# EAGLE board Artemis-Nano-Panel (EAGLE 9.4.0), part 1 of 4
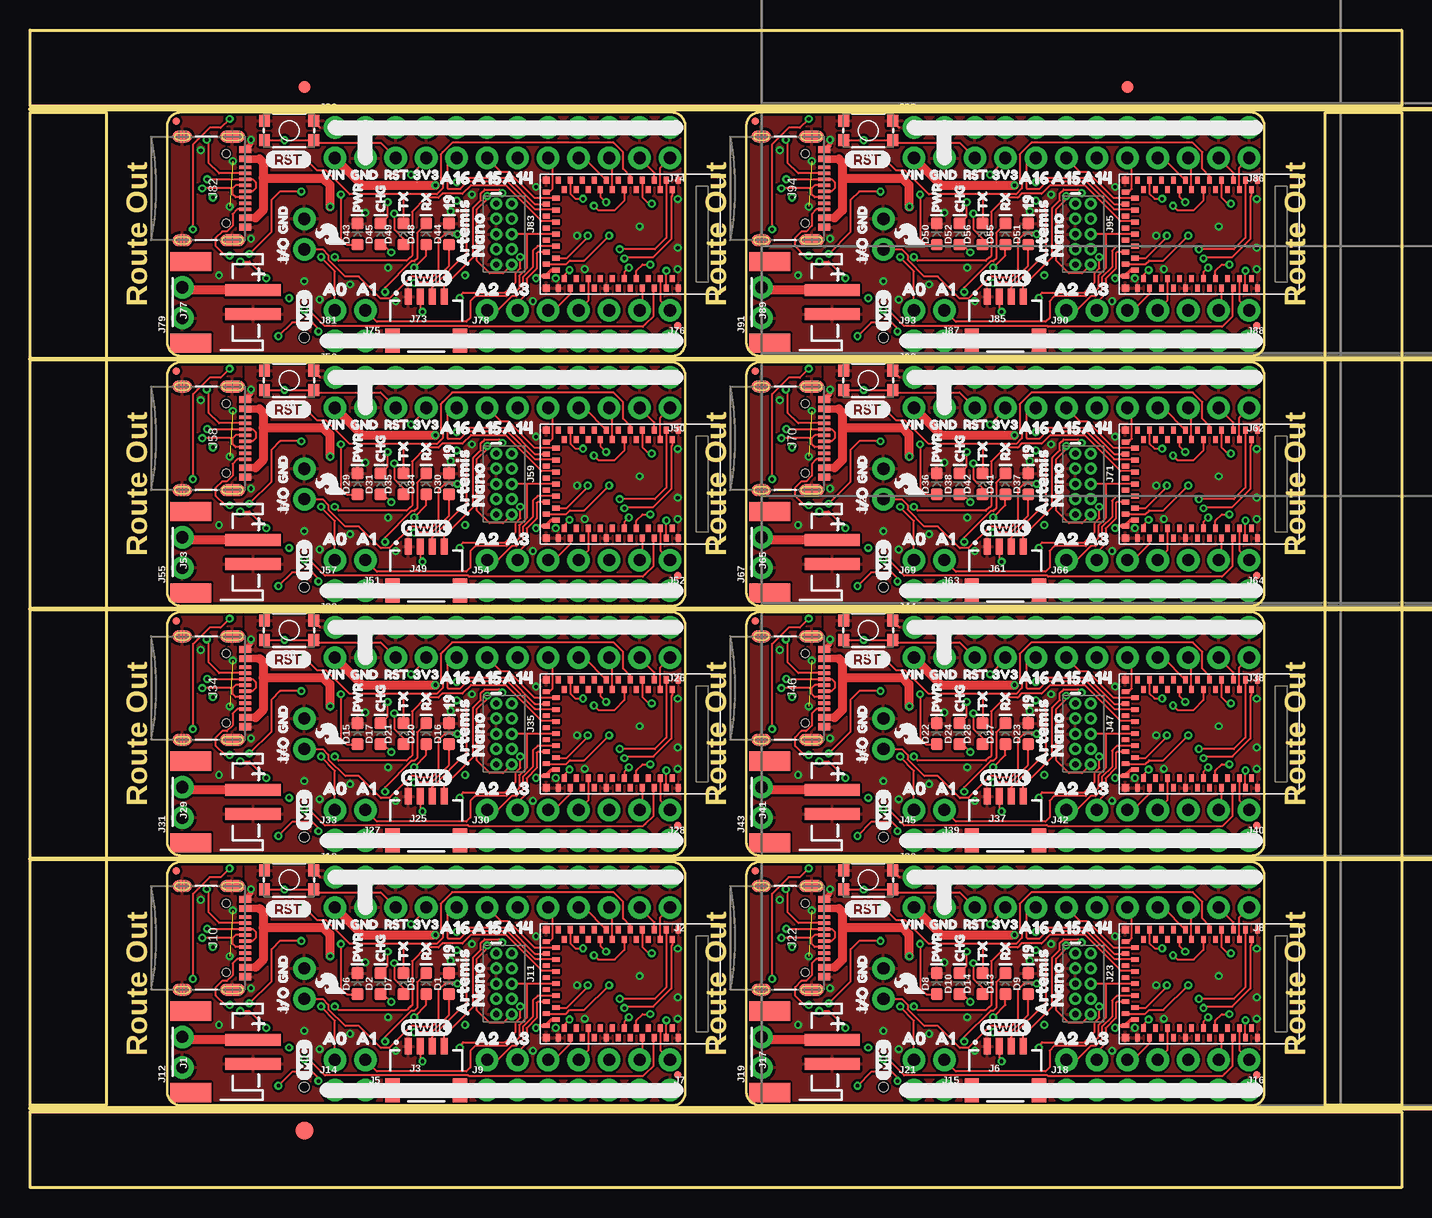
[diagram p0: board, top side]
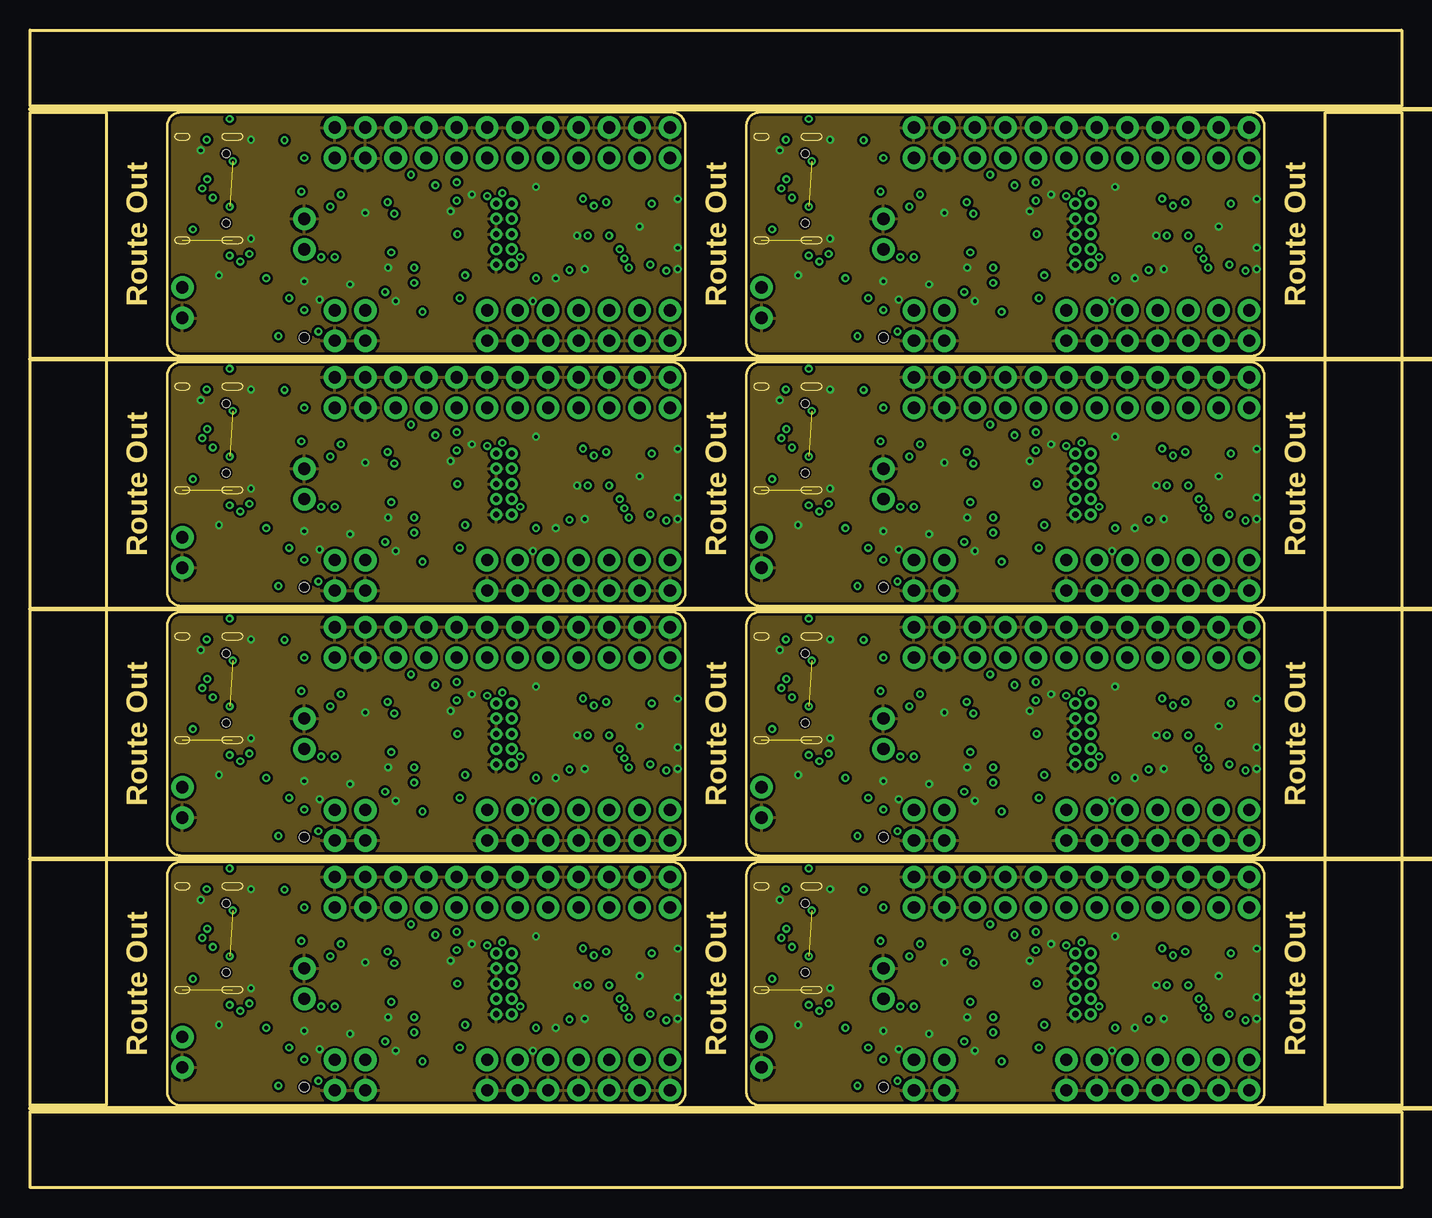
[diagram p1: board, inner layer Route2]
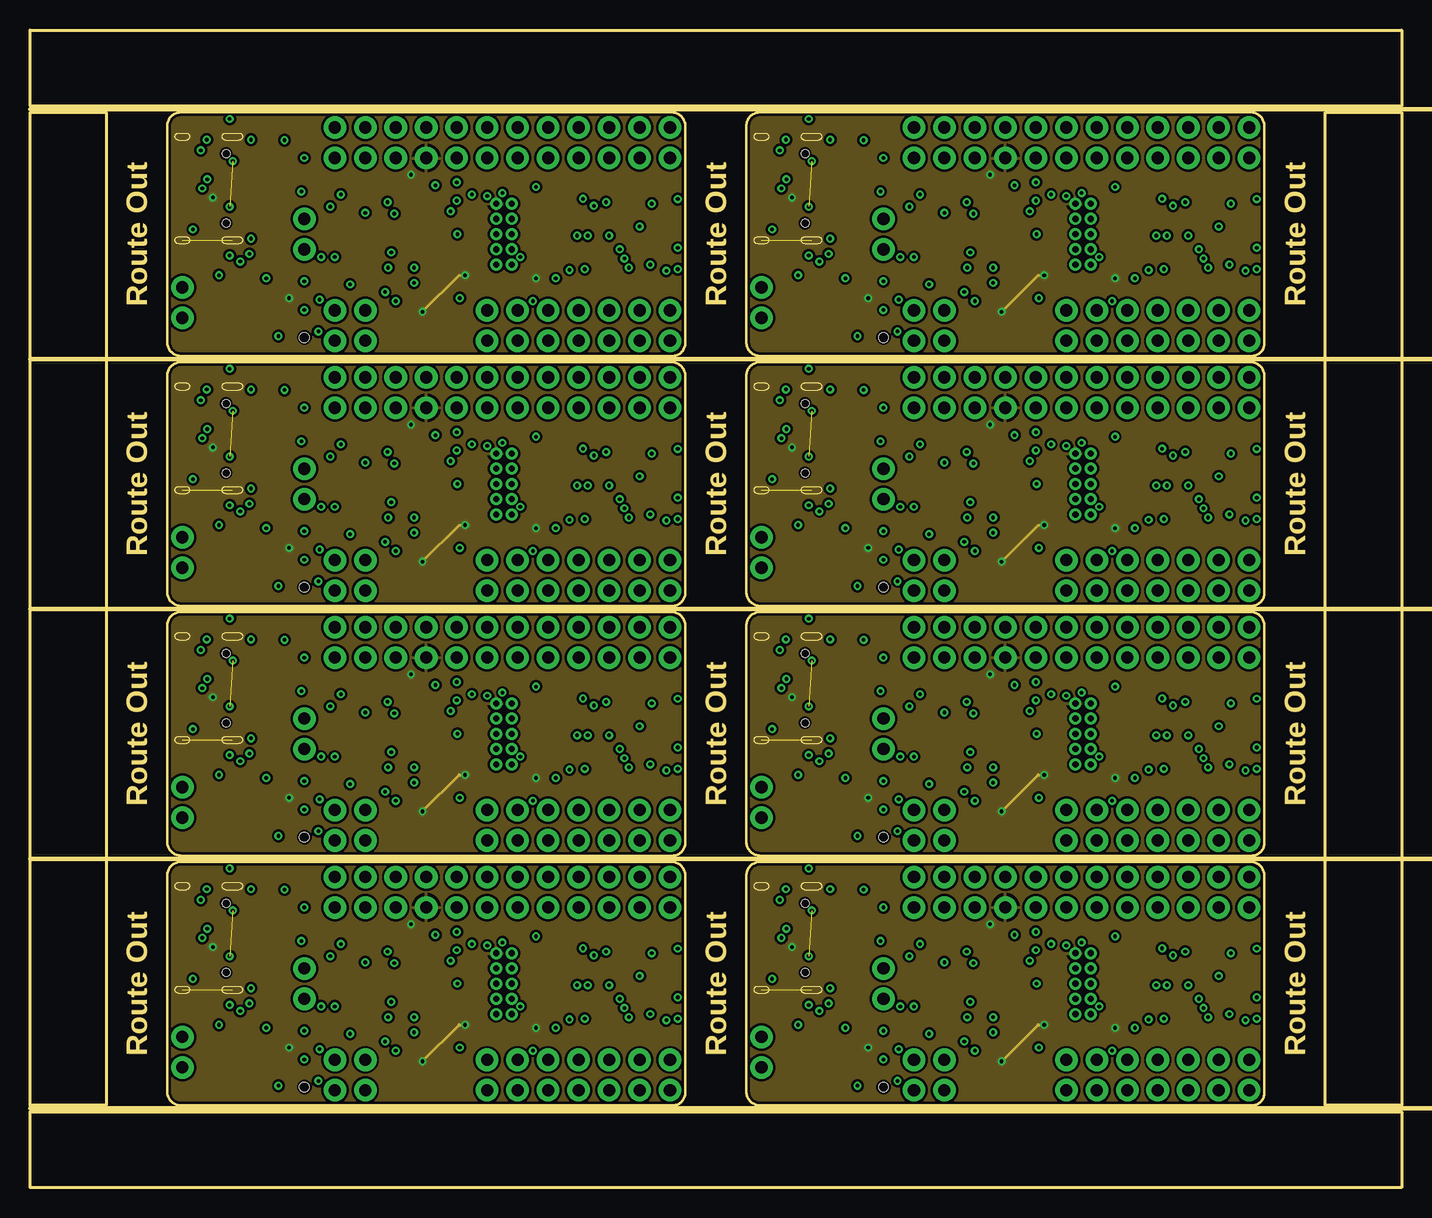
[diagram p2: board, inner layer Route15]
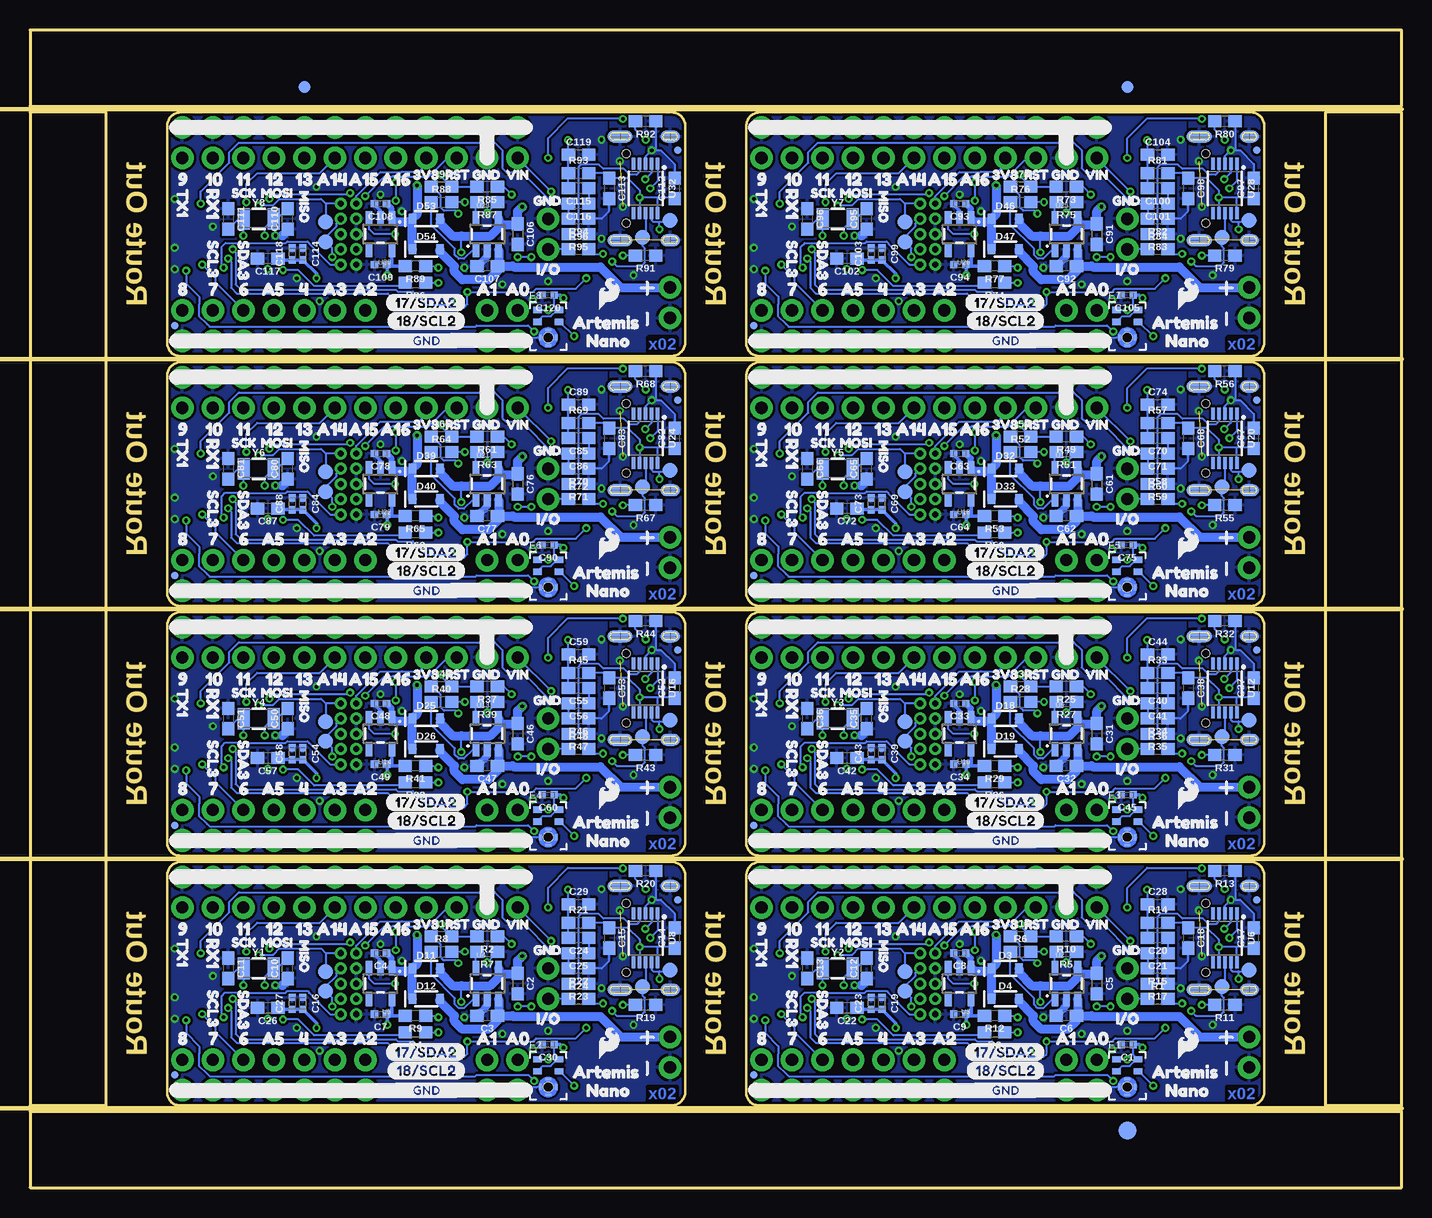
[diagram p3: board, bottom side, seen from below]

Size 114.3 x 96.52 mm. Coordinates in mm from the lower left corner, seen from the top.
Outline: 53.53,6.86 arc90 54.61,7.93 54.61,26.01 arc90 53.45,27.18 12.59,27.18 arc90 11.43,26.01 11.43,8.02 arc90 12.59,6.86 53.53,6.86
Outline: 101.79,6.86 arc90 102.87,7.93 102.87,26.01 arc90 101.71,27.18 60.85,27.18 arc90 59.69,26.01 59.69,8.02 arc90 60.85,6.86 101.79,6.86
Outline: 53.53,27.69 arc90 54.61,28.76 54.61,46.84 arc90 53.45,48.01 12.59,48.01 arc90 11.43,46.84 11.43,28.85 arc90 12.59,27.69 53.53,27.69
Outline: 101.79,27.69 arc90 102.87,28.76 102.87,46.84 arc90 101.71,48.01 60.85,48.01 arc90 59.69,46.84 59.69,28.85 arc90 60.85,27.69 101.79,27.69
Outline: 53.53,48.51 arc90 54.61,49.59 54.61,67.67 arc90 53.45,68.83 12.59,68.83 arc90 11.43,67.67 11.43,49.68 arc90 12.59,48.51 53.53,48.51
Outline: 101.79,48.51 arc90 102.87,49.59 102.87,67.67 arc90 101.71,68.83 60.85,68.83 arc90 59.69,67.67 59.69,49.68 arc90 60.85,48.51 101.79,48.51
Outline: 53.53,69.34 arc90 54.61,70.42 54.61,88.5 arc90 53.45,89.66 12.59,89.66 arc90 11.43,88.5 11.43,70.51 arc90 12.59,69.34 53.53,69.34
Outline: 101.79,69.34 arc90 102.87,70.42 102.87,88.5 arc90 101.71,89.66 60.85,89.66 arc90 59.69,88.5 59.69,70.51 arc90 60.85,69.34 101.79,69.34
Outline: 0,6.35 114.3,6.35 114.3,0 0,0 0,6.35
Outline: 107.95,89.66 114.3,89.66 114.3,6.86 107.95,6.86 107.95,89.66
Outline: 0,96.52 114.3,96.52 114.3,90.17 0,90.17 0,96.52
Outline: 0,89.66 6.35,89.66 6.35,6.86 0,6.86 0,89.66
Copper layers (1*2*15*16): Top 0.035559375mm / dielectric 0.47751875mm / Route2 0.035559375mm / dielectric 0.47751875mm / Route15 0.035559375mm / dielectric 0.47751875mm / Bottom 0.035559375mm
Design rules "SparkFun-4-layer-TIGHT": minimum track width 7mil, minimum drill 15mil, track to track 7mil, track to pad 7mil, pad to pad 7mil, via to via 7mil, smd to smd 7mil, copper to edge 7mil, drill to drill 7mil, minimum pad ring 7mil, minimum via ring 7mil, stop-mask expansion 4mil, vias tented up to drill 25mil, thermal gap 10mil
Net classes: 0 default: width 0 mm, drill 0 mm; 1 power: width 0.762 mm
Milling: 5 lines

## Footprints (pad centres in the part's own frame; a part is rotated, then mirrored left to right if it is on the bottom)
0402-TIGHT = smd 0.6 x 0.6: 1 -0.5,0; 2 0.5,0
0603 = smd 1.1 x 1: 1 -0.85,0; 2 0.85,0
LED-0603 = smd 1 x 1: A -0.877,0; C 0.877,0
SOD-323 = smd 0.63 x 0.83: A 1.15,0; C -1.15,0
SPH0641LM4H-1_MICROPHONE = smd 0.725 x 0.522: 1 -0.9,1.3; 2 -0.9,0.3; 4 0.9,0.3; 5 0.9,1.3 | smd 0.5 x 0.2: 3 0,-1.65; 8 0,-0.35 | smd 0.2 x 0.5: 6 -0.65,-1; 7 0.65,-1 | hole 0.8: 0,-1
FIDUCIAL-1X2 = smd 1 x 1: 1 0,0
FIDUCIAL-1.5X3 = smd 1.5 x 1.5: 1 0,0
FIDUCIAL-MICRO = smd 0.635 x 0.635: 1 0,0
JST-2-SMD = smd 1 x 4.6: 1 -1,-3.7; 2 1,-3.7 | smd 1.6 x 3.4: NC1 -3.4,1.5; NC2 3.4,1.5
1X12_NO_SILK = drill 1.016 pad 1.88: 1 0,0; 2 2.54,0; 3 5.08,0; 4 7.62,0; 5 10.16,0; 6 12.7,0; 7 15.24,0; 8 17.78,0; 9 20.32,0; 10 22.86,0; 11 25.4,0; 12 27.94,0
JST04_1MM_RA = smd 0.6 x 1.35: 1 -1.5,0; 2 -0.5,0; 3 0.5,0; 4 1.5,0 | smd 1.2 x 2: NC1 2.8,-3.675; NC2 -2.8,-3.675
1X02_NO_SILK = drill 1.016 pad 1.88: 1 0,0; 2 2.54,0
1X07_NO_SILK = drill 1.016 pad 1.88: 1 0,0; 2 2.54,0; 3 5.08,0; 4 7.62,0; 5 10.16,0; 6 12.7,0; 7 15.24,0
USB-C-16P = smd 0.3 x 1.016: A5 -1.25,0.154; A6 -0.25,0.154; A7 0.25,0.154; A8 1.25,0.154; B5 1.75,0.154; B6 0.75,0.154; B7 -0.75,0.154; B8 -1.75,0.154 | smd 0.6 x 1.016: GND -3.225,0.154; GND2 3.225,0.154 | smd 1 x 2.1: SHLD1 -4.32,-0.915; SHLD2 4.32,-0.915 | smd 1 x 2.1 bottom: SHLD3 -4.32,-0.915; SHLD4 4.32,-0.915 | smd 1 x 1.6: SHLD5 -4.32,-5.095; SHLD8 4.32,-5.095 | smd 1 x 1.6 bottom: SHLD6 -4.32,-5.095; SHLD7 4.32,-5.095 | smd 0.55 x 1.016: VBUS1 -2.45,0.154; VBUS2 2.45,0.154 | hole 0.65: -2.89,-1.445; 2.89,-1.445
2X5-PTH-1.27MM-NO_SILK = drill 0.508 pad 1: 1 -2.54,-0.635; 2 -2.54,0.635; 3 -1.27,-0.635; 4 -1.27,0.635; 5 0,-0.635; 6 0,0.635; 7 1.27,-0.635; 8 1.27,0.635; 9 2.54,-0.635; 10 2.54,0.635
TACTILE_SWITCH_SMD_4.6X2.8MM = smd 0.9 x 1: 1 -2.05,-0.8; 2 2.05,-0.8; 3 2.05,0.8; 4 -2.05,0.8
PAD.03X.05 = smd 1.27 x 1.27: P$1 0,0
ARTEMIS_FP = smd 0.4 x 0.6: AD16 -4,-3.7; BOOT 1.5,4.5; D0 0.5,-4.5; D1 -0.5,-4.5; D2 -1,-3.7; D3 2,-3.7; D7 -1.5,4.5; D8 -0.5,4.5; D9 2,3.7; D10 1,3.7; D14 -5,3.7; D17 -3.5,-4.5; D36 2.5,-4.5; D38 3,-3.7; D40 2.5,4.5; D41 -2.5,-4.5; GND@1 4.5,4.5; GND@39 -5.5,-4.5; GND@47 -1.5,-4.5; GND@59 4.5,-4.5; RXI-0 3.5,4.5; SWDCK 4,3.7; SWDIO 0,3.7; TXO-0 0.5,4.5; ~AD31 -3,-3.7; ~AD35 -2,3.7; ~D4 -2.5,4.5; ~D5 -1,3.7; ~D18 -4.5,-4.5; ~D19 -5,-3.7; ~D22 -3.5,4.5; ~D23 -4,3.7; ~D24 -3,3.7; ~D27 -4.5,4.5; ~D28 -5.5,4.5; ~D37 3.5,-4.5; ~D39 3,3.7; ~D42 1.5,-4.5; ~D43 1,-3.7; ~D44 4,-3.7; ~D45 -2,-3.7; ~RST 0,-3.7 | smd 0.6 x 0.4: AD34 -6.5,-0.5; D15 -6.5,0.5; VDD@36 -5.7,-3; VDD@37 -6.5,-3.5; XI -6.5,-2.5; XO -5.7,-2; ~AD11 -5.7,-1; ~AD12 -5.7,2; ~AD13 -5.7,1; ~AD29 -6.5,-1.5; ~AD32 -5.7,3; ~AD33/SWO -5.7,0; ~D6 -6.5,3.5; ~D25 -6.5,2.5; ~D26 -6.5,1.5 | smd 0.6 x 0.6: GND@22 -6.5,4.5; GND@38 -6.5,-4.5
SOT23-5 = smd 0.55 x 1.2: 1 -0.95,-1.3; 2 0,-1.3; 3 0.95,-1.3; 4 0.95,1.3; 5 -0.95,1.3
MSOP10 = smd 1 x 0.3: 1 -2.05,1; 2 -2.05,0.5; 3 -2.05,0; 4 -2.05,-0.5; 5 -2.05,-1; 6 2.05,-1; 7 2.05,-0.5; 8 2.05,0; 9 2.05,0.5; 10 2.05,1
CRYSTAL-SMD-3.2X1.5MM = smd 1 x 1.8: P$1 -1.25,0; P$2 1.25,0

## Placement (x,y rotation side)
C1  0.1uF  [0402-TIGHT]  22.86,11.94 180 bottom
C2  4.7uF  [0603]  73.66,17.02 270 bottom
C3  4.7uF  [0603]  76.2,14.35 180 bottom
C4  1.0uF  [0402-TIGHT]  85.09,19.56 180 bottom
C5  4.7uF  [0603]  25.4,17.02 270 bottom
C6  4.7uF  [0603]  27.94,14.35 180 bottom
C7  1.0uF  [0402-TIGHT]  85.09,14.48 180 bottom
C8  1.0uF  [0402-TIGHT]  36.83,19.56 180 bottom
C9  1.0uF  [0402-TIGHT]  36.83,14.48 180 bottom
C10  15pF  [0603]  92.84,18.29 90 bottom
C11  15pF  [0603]  97.79,18.29 270 bottom
C12  15pF  [0603]  44.58,18.29 90 bottom
C13  15pF  [0603]  49.53,18.29 270 bottom
C14  10nF  [0603]  60.58,20.83 90 bottom
C15  0.1uF  [0603]  66.04,20.83 270 bottom
C16  0.1uF  [0402-TIGHT]  91.57,15.37 270 bottom
C17  10nF  [0603]  12.32,20.83 90 bottom
C18  0.1uF  [0603]  17.78,20.83 270 bottom
C19  0.1uF  [0402-TIGHT]  43.31,15.37 270 bottom
C20  0.1uF  [0603]  20.32,20.83 180 bottom
C21  2.2uF  [0603]  20.32,19.56 180 bottom
C22  10uF  [0603]  46.23,14.99 180 bottom
C23  1.0uF  [0402-TIGHT]  44.2,15.37 90 bottom
C24  0.1uF  [0603]  68.58,20.83 180 bottom
C25  2.2uF  [0603]  68.58,19.56 180 bottom
C26  10uF  [0603]  94.49,14.99 180 bottom
C27  1.0uF  [0402-TIGHT]  92.46,15.37 90 bottom
C28  1nF  [0603]  20.32,23.62 0 bottom
C29  1nF  [0603]  68.58,23.62 0 bottom
C30  0.1uF  [0402-TIGHT]  71.12,11.94 180 bottom
C31  4.7uF  [0603]  25.4,37.85 270 bottom
C32  4.7uF  [0603]  27.94,35.18 180 bottom
C33  1.0uF  [0402-TIGHT]  36.83,40.39 180 bottom
C34  1.0uF  [0402-TIGHT]  36.83,35.31 180 bottom
C35  15pF  [0603]  44.58,39.12 90 bottom
C36  15pF  [0603]  49.53,39.12 270 bottom
C37  10nF  [0603]  12.32,41.66 90 bottom
C38  0.1uF  [0603]  17.78,41.66 270 bottom
C39  0.1uF  [0402-TIGHT]  43.31,36.2 270 bottom
C40  0.1uF  [0603]  20.32,41.66 180 bottom
C41  2.2uF  [0603]  20.32,40.39 180 bottom
C42  10uF  [0603]  46.23,35.81 180 bottom
C43  1.0uF  [0402-TIGHT]  44.2,36.2 90 bottom
C44  1nF  [0603]  20.32,44.45 0 bottom
C45  0.1uF  [0402-TIGHT]  22.86,32.77 180 bottom
C46  4.7uF  [0603]  73.66,37.85 270 bottom
C47  4.7uF  [0603]  76.2,35.18 180 bottom
C48  1.0uF  [0402-TIGHT]  85.09,40.39 180 bottom
C49  1.0uF  [0402-TIGHT]  85.09,35.31 180 bottom
C50  15pF  [0603]  92.84,39.12 90 bottom
C51  15pF  [0603]  97.79,39.12 270 bottom
C52  10nF  [0603]  60.58,41.66 90 bottom
C53  0.1uF  [0603]  66.04,41.66 270 bottom
C54  0.1uF  [0402-TIGHT]  91.57,36.2 270 bottom
C55  0.1uF  [0603]  68.58,41.66 180 bottom
C56  2.2uF  [0603]  68.58,40.39 180 bottom
C57  10uF  [0603]  94.49,35.81 180 bottom
C58  1.0uF  [0402-TIGHT]  92.46,36.2 90 bottom
C59  1nF  [0603]  68.58,44.45 0 bottom
C60  0.1uF  [0402-TIGHT]  71.12,32.77 180 bottom
C61  4.7uF  [0603]  25.4,58.67 270 bottom
C62  4.7uF  [0603]  27.94,56.01 180 bottom
C63  1.0uF  [0402-TIGHT]  36.83,61.21 180 bottom
C64  1.0uF  [0402-TIGHT]  36.83,56.13 180 bottom
C65  15pF  [0603]  44.58,59.94 90 bottom
C66  15pF  [0603]  49.53,59.94 270 bottom
C67  10nF  [0603]  12.32,62.48 90 bottom
C68  0.1uF  [0603]  17.78,62.48 270 bottom
C69  0.1uF  [0402-TIGHT]  43.31,57.02 270 bottom
C70  0.1uF  [0603]  20.32,62.48 180 bottom
C71  2.2uF  [0603]  20.32,61.21 180 bottom
C72  10uF  [0603]  46.23,56.64 180 bottom
C73  1.0uF  [0402-TIGHT]  44.2,57.02 90 bottom
C74  1nF  [0603]  20.32,65.28 0 bottom
C75  0.1uF  [0402-TIGHT]  22.86,53.59 180 bottom
C76  4.7uF  [0603]  73.66,58.67 270 bottom
C77  4.7uF  [0603]  76.2,56.01 180 bottom
C78  1.0uF  [0402-TIGHT]  85.09,61.21 180 bottom
C79  1.0uF  [0402-TIGHT]  85.09,56.13 180 bottom
C80  15pF  [0603]  92.84,59.94 90 bottom
C81  15pF  [0603]  97.79,59.94 270 bottom
C82  10nF  [0603]  60.58,62.48 90 bottom
C83  0.1uF  [0603]  66.04,62.48 270 bottom
C84  0.1uF  [0402-TIGHT]  91.57,57.02 270 bottom
C85  0.1uF  [0603]  68.58,62.48 180 bottom
C86  2.2uF  [0603]  68.58,61.21 180 bottom
C87  10uF  [0603]  94.49,56.64 180 bottom
C88  1.0uF  [0402-TIGHT]  92.46,57.02 90 bottom
C89  1nF  [0603]  68.58,65.28 0 bottom
C90  0.1uF  [0402-TIGHT]  71.12,53.59 180 bottom
C91  4.7uF  [0603]  25.4,79.5 270 bottom
C92  4.7uF  [0603]  27.94,76.84 180 bottom
C93  1.0uF  [0402-TIGHT]  36.83,82.04 180 bottom
C94  1.0uF  [0402-TIGHT]  36.83,76.96 180 bottom
C95  15pF  [0603]  44.58,80.77 90 bottom
C96  15pF  [0603]  49.53,80.77 270 bottom
C97  10nF  [0603]  12.32,83.31 90 bottom
C98  0.1uF  [0603]  17.78,83.31 270 bottom
C99  0.1uF  [0402-TIGHT]  43.31,77.85 270 bottom
C100  0.1uF  [0603]  20.32,83.31 180 bottom
C101  2.2uF  [0603]  20.32,82.04 180 bottom
C102  10uF  [0603]  46.23,77.47 180 bottom
C103  1.0uF  [0402-TIGHT]  44.2,77.85 90 bottom
C104  1nF  [0603]  20.32,86.11 0 bottom
C105  0.1uF  [0402-TIGHT]  22.86,74.42 180 bottom
C106  4.7uF  [0603]  73.66,79.5 270 bottom
C107  4.7uF  [0603]  76.2,76.84 180 bottom
C108  1.0uF  [0402-TIGHT]  85.09,82.04 180 bottom
C109  1.0uF  [0402-TIGHT]  85.09,76.96 180 bottom
C110  15pF  [0603]  92.84,80.77 90 bottom
C111  15pF  [0603]  97.79,80.77 270 bottom
C112  10nF  [0603]  60.58,83.31 90 bottom
C113  0.1uF  [0603]  66.04,83.31 270 bottom
C114  0.1uF  [0402-TIGHT]  91.57,77.85 270 bottom
C115  0.1uF  [0603]  68.58,83.31 180 bottom
C116  2.2uF  [0603]  68.58,82.04 180 bottom
C117  10uF  [0603]  94.49,77.47 180 bottom
C118  1.0uF  [0402-TIGHT]  92.46,77.85 90 bottom
C119  1nF  [0603]  68.58,86.11 0 bottom
C120  0.1uF  [0402-TIGHT]  71.12,74.42 180 bottom
D1  BLUE  [LED-0603]  34.92,17.02 90 top
D2  Yellow  [LED-0603]  29.21,17.02 90 top
D3  1A/23V/620mV  [SOD-323]  33.02,18.29 0 bottom
D4  1A/23V/620mV  [SOD-323]  33.02,15.75 0 bottom
D5  Yellow  [LED-0603]  33.02,17.02 90 top
D6  RED  [LED-0603]  27.3,17.02 90 top
D7  GREEN  [LED-0603]  31.11,17.02 90 top
D8  RED  [LED-0603]  75.56,17.02 90 top
D9  BLUE  [LED-0603]  83.19,17.02 90 top
D10  Yellow  [LED-0603]  77.47,17.02 90 top
D11  1A/23V/620mV  [SOD-323]  81.28,18.29 0 bottom
D12  1A/23V/620mV  [SOD-323]  81.28,15.75 0 bottom
D13  Yellow  [LED-0603]  81.28,17.02 90 top
D14  GREEN  [LED-0603]  79.38,17.02 90 top
D15  RED  [LED-0603]  27.3,37.85 90 top
D16  BLUE  [LED-0603]  34.92,37.85 90 top
D17  Yellow  [LED-0603]  29.21,37.85 90 top
D18  1A/23V/620mV  [SOD-323]  33.02,39.12 0 bottom
D19  1A/23V/620mV  [SOD-323]  33.02,36.58 0 bottom
D20  Yellow  [LED-0603]  33.02,37.85 90 top
D21  GREEN  [LED-0603]  31.11,37.85 90 top
D22  RED  [LED-0603]  75.56,37.85 90 top
D23  BLUE  [LED-0603]  83.19,37.85 90 top
D24  Yellow  [LED-0603]  77.47,37.85 90 top
D25  1A/23V/620mV  [SOD-323]  81.28,39.12 0 bottom
D26  1A/23V/620mV  [SOD-323]  81.28,36.58 0 bottom
D27  Yellow  [LED-0603]  81.28,37.85 90 top
D28  GREEN  [LED-0603]  79.38,37.85 90 top
D29  RED  [LED-0603]  27.3,58.67 90 top
D30  BLUE  [LED-0603]  34.92,58.67 90 top
D31  Yellow  [LED-0603]  29.21,58.67 90 top
D32  1A/23V/620mV  [SOD-323]  33.02,59.94 0 bottom
D33  1A/23V/620mV  [SOD-323]  33.02,57.4 0 bottom
D34  Yellow  [LED-0603]  33.02,58.67 90 top
D35  GREEN  [LED-0603]  31.11,58.67 90 top
D36  RED  [LED-0603]  75.56,58.67 90 top
D37  BLUE  [LED-0603]  83.19,58.67 90 top
D38  Yellow  [LED-0603]  77.47,58.67 90 top
D39  1A/23V/620mV  [SOD-323]  81.28,59.94 0 bottom
D40  1A/23V/620mV  [SOD-323]  81.28,57.4 0 bottom
D41  Yellow  [LED-0603]  81.28,58.67 90 top
D42  GREEN  [LED-0603]  79.38,58.67 90 top
D43  RED  [LED-0603]  27.3,79.5 90 top
D44  BLUE  [LED-0603]  34.92,79.5 90 top
D45  Yellow  [LED-0603]  29.21,79.5 90 top
D46  1A/23V/620mV  [SOD-323]  33.02,80.77 0 bottom
D47  1A/23V/620mV  [SOD-323]  33.02,78.23 0 bottom
D48  Yellow  [LED-0603]  33.02,79.5 90 top
D49  GREEN  [LED-0603]  31.11,79.5 90 top
D50  RED  [LED-0603]  75.56,79.5 90 top
D51  BLUE  [LED-0603]  83.19,79.5 90 top
D52  Yellow  [LED-0603]  77.47,79.5 90 top
D53  1A/23V/620mV  [SOD-323]  81.28,80.77 0 bottom
D54  1A/23V/620mV  [SOD-323]  81.28,78.23 0 bottom
D55  Yellow  [LED-0603]  81.28,79.5 90 top
D56  GREEN  [LED-0603]  79.38,79.5 90 top
E1  SPH0641LM4H  [SPH0641LM4H-1_MICROPHONE]  22.86,9.4 0 bottom
E2  SPH0641LM4H  [SPH0641LM4H-1_MICROPHONE]  71.12,9.4 0 bottom
E3  SPH0641LM4H  [SPH0641LM4H-1_MICROPHONE]  22.86,30.23 0 bottom
E4  SPH0641LM4H  [SPH0641LM4H-1_MICROPHONE]  71.12,30.23 0 bottom
E5  SPH0641LM4H  [SPH0641LM4H-1_MICROPHONE]  22.86,51.05 0 bottom
E6  SPH0641LM4H  [SPH0641LM4H-1_MICROPHONE]  71.12,51.05 0 bottom
E7  SPH0641LM4H  [SPH0641LM4H-1_MICROPHONE]  22.86,71.88 0 bottom
E8  SPH0641LM4H  [SPH0641LM4H-1_MICROPHONE]  71.12,71.88 0 bottom
E$1  [FIDUCIAL-1X2]  22.86,91.76 0 top
E$2  [FIDUCIAL-1X2]  22.86,91.76 0 bottom
E$3  [FIDUCIAL-1X2]  91.44,91.76 0 top
E$4  [FIDUCIAL-1X2]  91.44,91.76 0 bottom
E$5  [FIDUCIAL-1.5X3]  22.86,4.76 0 top
E$6  [FIDUCIAL-1.5X3]  22.86,4.76 0 bottom
FD1  FIDUCIALUFIDUCIAL  [FIDUCIAL-MICRO]  53.98,9.4 0 top
FD2  FIDUCIALUFIDUCIAL  [FIDUCIAL-MICRO]  12.19,26.42 0 top
FD3  FIDUCIALUFIDUCIAL  [FIDUCIAL-MICRO]  12.06,24 0 bottom
FD4  FIDUCIALUFIDUCIAL  [FIDUCIAL-MICRO]  53.98,9.4 0 bottom
FD5  FIDUCIALUFIDUCIAL  [FIDUCIAL-MICRO]  102.24,9.4 0 top
FD6  FIDUCIALUFIDUCIAL  [FIDUCIAL-MICRO]  60.45,26.42 0 top
FD7  FIDUCIALUFIDUCIAL  [FIDUCIAL-MICRO]  60.33,24 0 bottom
FD8  FIDUCIALUFIDUCIAL  [FIDUCIAL-MICRO]  102.24,9.4 0 bottom
FD9  FIDUCIALUFIDUCIAL  [FIDUCIAL-MICRO]  53.98,30.23 0 top
FD10  FIDUCIALUFIDUCIAL  [FIDUCIAL-MICRO]  12.19,47.24 0 top
FD11  FIDUCIALUFIDUCIAL  [FIDUCIAL-MICRO]  12.06,44.83 0 bottom
FD12  FIDUCIALUFIDUCIAL  [FIDUCIAL-MICRO]  53.98,30.23 0 bottom
FD13  FIDUCIALUFIDUCIAL  [FIDUCIAL-MICRO]  102.24,30.23 0 top
FD14  FIDUCIALUFIDUCIAL  [FIDUCIAL-MICRO]  60.45,47.24 0 top
FD15  FIDUCIALUFIDUCIAL  [FIDUCIAL-MICRO]  60.33,44.83 0 bottom
FD16  FIDUCIALUFIDUCIAL  [FIDUCIAL-MICRO]  102.24,30.23 0 bottom
FD17  FIDUCIALUFIDUCIAL  [FIDUCIAL-MICRO]  53.98,51.05 0 top
FD18  FIDUCIALUFIDUCIAL  [FIDUCIAL-MICRO]  12.19,68.07 0 top
FD19  FIDUCIALUFIDUCIAL  [FIDUCIAL-MICRO]  12.06,65.66 0 bottom
FD20  FIDUCIALUFIDUCIAL  [FIDUCIAL-MICRO]  53.98,51.05 0 bottom
FD21  FIDUCIALUFIDUCIAL  [FIDUCIAL-MICRO]  102.24,51.05 0 top
FD22  FIDUCIALUFIDUCIAL  [FIDUCIAL-MICRO]  60.45,68.07 0 top
FD23  FIDUCIALUFIDUCIAL  [FIDUCIAL-MICRO]  60.33,65.66 0 bottom
FD24  FIDUCIALUFIDUCIAL  [FIDUCIAL-MICRO]  102.24,51.05 0 bottom
FD25  FIDUCIALUFIDUCIAL  [FIDUCIAL-MICRO]  53.98,71.88 0 top
FD26  FIDUCIALUFIDUCIAL  [FIDUCIAL-MICRO]  12.19,88.9 0 top
FD27  FIDUCIALUFIDUCIAL  [FIDUCIAL-MICRO]  12.06,86.49 0 bottom
FD28  FIDUCIALUFIDUCIAL  [FIDUCIAL-MICRO]  53.98,71.88 0 bottom
FD29  FIDUCIALUFIDUCIAL  [FIDUCIAL-MICRO]  102.24,71.88 0 top
FD30  FIDUCIALUFIDUCIAL  [FIDUCIAL-MICRO]  60.45,88.9 0 top
FD31  FIDUCIALUFIDUCIAL  [FIDUCIAL-MICRO]  60.33,86.49 0 bottom
FD32  FIDUCIALUFIDUCIAL  [FIDUCIAL-MICRO]  102.24,71.88 0 bottom
FRAME1  FRAME-LETTERNO_PACKAGE  [DUMMY]  59.69,6.86 0 bottom
FRAME2  FRAME-LETTERNO_PACKAGE  [DUMMY]  11.43,6.86 0 bottom
FRAME3  FRAME-LETTERNO_PACKAGE  [DUMMY]  11.43,27.69 0 bottom
FRAME4  FRAME-LETTERNO_PACKAGE  [DUMMY]  59.69,27.69 0 bottom
FRAME5  FRAME-LETTERNO_PACKAGE  [DUMMY]  11.43,48.51 0 bottom
FRAME6  FRAME-LETTERNO_PACKAGE  [DUMMY]  59.69,48.51 0 bottom
FRAME7  FRAME-LETTERNO_PACKAGE  [DUMMY]  11.43,69.34 0 bottom
FRAME8  FRAME-LETTERNO_PACKAGE  [DUMMY]  59.69,69.34 0 bottom
J1  [JST-2-SMD]  14.88,11.33 90 top
J2  [1X12_NO_SILK]  53.34,23.37 180 top
J3  [JST04_1MM_RA]  33.02,11.81 0 top
J4  [1X02_NO_SILK]  22.86,15.75 90 top
J5  [1X02_NO_SILK]  27.94,10.67 180 top
J6  [JST04_1MM_RA]  81.28,11.81 0 top
J7  [1X07_NO_SILK]  53.34,10.67 180 top
J8  [1X12_NO_SILK]  101.6,23.37 180 top
J9  [1X07_NO_SILK]  38.1,8.13 0 top
J10  USB-C  [USB-C-16P]  17.78,20.83 270 top
J11  CORTEX_DEBUG  [2X5-PTH-1.27MM-NO_SILK]  39.5,17.02 270 top
J12  [1X02_NO_SILK]  12.7,10.03 90 top
J13  [1X12_NO_SILK]  25.4,25.91 0 top
J14  [1X02_NO_SILK]  25.4,8.13 0 top
J15  [1X02_NO_SILK]  76.2,10.67 180 top
J16  [1X07_NO_SILK]  101.6,10.67 180 top
J17  [JST-2-SMD]  63.14,11.33 90 top
J18  [1X07_NO_SILK]  86.36,8.13 0 top
J19  [1X02_NO_SILK]  60.96,10.03 90 top
J20  [1X12_NO_SILK]  73.66,25.91 0 top
J21  [1X02_NO_SILK]  73.66,8.13 0 top
J22  USB-C  [USB-C-16P]  66.04,20.83 270 top
J23  CORTEX_DEBUG  [2X5-PTH-1.27MM-NO_SILK]  87.76,17.02 270 top
J24  [1X02_NO_SILK]  71.12,15.75 90 top
J25  [JST04_1MM_RA]  33.02,32.64 0 top
J26  [1X12_NO_SILK]  53.34,44.2 180 top
J27  [1X02_NO_SILK]  27.94,31.5 180 top
J28  [1X07_NO_SILK]  53.34,31.5 180 top
J29  [JST-2-SMD]  14.88,32.16 90 top
J30  [1X07_NO_SILK]  38.1,28.96 0 top
J31  [1X02_NO_SILK]  12.7,30.86 90 top
J32  [1X12_NO_SILK]  25.4,46.74 0 top
J33  [1X02_NO_SILK]  25.4,28.96 0 top
J34  USB-C  [USB-C-16P]  17.78,41.66 270 top
J35  CORTEX_DEBUG  [2X5-PTH-1.27MM-NO_SILK]  39.5,37.85 270 top
J36  [1X02_NO_SILK]  22.86,36.58 90 top
J37  [JST04_1MM_RA]  81.28,32.64 0 top
J38  [1X12_NO_SILK]  101.6,44.2 180 top
J39  [1X02_NO_SILK]  76.2,31.5 180 top
J40  [1X07_NO_SILK]  101.6,31.5 180 top
J41  [JST-2-SMD]  63.14,32.16 90 top
J42  [1X07_NO_SILK]  86.36,28.96 0 top
J43  [1X02_NO_SILK]  60.96,30.86 90 top
J44  [1X12_NO_SILK]  73.66,46.74 0 top
J45  [1X02_NO_SILK]  73.66,28.96 0 top
J46  USB-C  [USB-C-16P]  66.04,41.66 270 top
J47  CORTEX_DEBUG  [2X5-PTH-1.27MM-NO_SILK]  87.76,37.85 270 top
J48  [1X02_NO_SILK]  71.12,36.58 90 top
J49  [JST04_1MM_RA]  33.02,53.47 0 top
J50  [1X12_NO_SILK]  53.34,65.02 180 top
J51  [1X02_NO_SILK]  27.94,52.32 180 top
J52  [1X07_NO_SILK]  53.34,52.32 180 top
J53  [JST-2-SMD]  14.88,52.98 90 top
J54  [1X07_NO_SILK]  38.1,49.78 0 top
J55  [1X02_NO_SILK]  12.7,51.69 90 top
J56  [1X12_NO_SILK]  25.4,67.56 0 top
J57  [1X02_NO_SILK]  25.4,49.78 0 top
J58  USB-C  [USB-C-16P]  17.78,62.48 270 top
J59  CORTEX_DEBUG  [2X5-PTH-1.27MM-NO_SILK]  39.5,58.67 270 top
J60  [1X02_NO_SILK]  22.86,57.4 90 top
J61  [JST04_1MM_RA]  81.28,53.47 0 top
J62  [1X12_NO_SILK]  101.6,65.02 180 top
J63  [1X02_NO_SILK]  76.2,52.32 180 top
J64  [1X07_NO_SILK]  101.6,52.32 180 top
J65  [JST-2-SMD]  63.14,52.98 90 top
J66  [1X07_NO_SILK]  86.36,49.78 0 top
J67  [1X02_NO_SILK]  60.96,51.69 90 top
J68  [1X12_NO_SILK]  73.66,67.56 0 top
J69  [1X02_NO_SILK]  73.66,49.78 0 top
J70  USB-C  [USB-C-16P]  66.04,62.48 270 top
J71  CORTEX_DEBUG  [2X5-PTH-1.27MM-NO_SILK]  87.76,58.67 270 top
J72  [1X02_NO_SILK]  71.12,57.4 90 top
J73  [JST04_1MM_RA]  33.02,74.3 0 top
J74  [1X12_NO_SILK]  53.34,85.85 180 top
J75  [1X02_NO_SILK]  27.94,73.15 180 top
J76  [1X07_NO_SILK]  53.34,73.15 180 top
J77  [JST-2-SMD]  14.88,73.81 90 top
J78  [1X07_NO_SILK]  38.1,70.61 0 top
J79  [1X02_NO_SILK]  12.7,72.52 90 top
J80  [1X12_NO_SILK]  25.4,88.39 0 top
J81  [1X02_NO_SILK]  25.4,70.61 0 top
J82  USB-C  [USB-C-16P]  17.78,83.31 270 top
J83  CORTEX_DEBUG  [2X5-PTH-1.27MM-NO_SILK]  39.5,79.5 270 top
J84  [1X02_NO_SILK]  22.86,78.23 90 top
J85  [JST04_1MM_RA]  81.28,74.3 0 top
J86  [1X12_NO_SILK]  101.6,85.85 180 top
J87  [1X02_NO_SILK]  76.2,73.15 180 top
J88  [1X07_NO_SILK]  101.6,73.15 180 top
J89  [JST-2-SMD]  63.14,73.81 90 top
J90  [1X07_NO_SILK]  86.36,70.61 0 top
J91  [1X02_NO_SILK]  60.96,72.52 90 top
J92  [1X12_NO_SILK]  73.66,88.39 0 top
J93  [1X02_NO_SILK]  73.66,70.61 0 top
J94  USB-C  [USB-C-16P]  66.04,83.31 270 top
J95  CORTEX_DEBUG  [2X5-PTH-1.27MM-NO_SILK]  87.76,79.5 270 top
J96  [1X02_NO_SILK]  71.12,78.23 90 top
LOGO1  SFE_LOGO_FLAME.1_INCH  [SFE_LOGO_FLAME_.1]  25.02,17.02 90 top
LOGO2  SFE_LOGO_FLAME.1_INCH  [SFE_LOGO_FLAME_.1]  73.28,17.02 90 top
LOGO3  SFE_LOGO_FLAME.1_INCH  [SFE_LOGO_FLAME_.1]  66.04,12.06 0 bottom
LOGO4  SFE_LOGO_FLAME.1_INCH  [SFE_LOGO_FLAME_.1]  17.78,12.06 0 bottom
LOGO5  SFE_LOGO_FLAME.1_INCH  [SFE_LOGO_FLAME_.1]  25.02,37.85 90 top
LOGO6  SFE_LOGO_FLAME.1_INCH  [SFE_LOGO_FLAME_.1]  17.78,32.89 0 bottom
LOGO7  SFE_LOGO_FLAME.1_INCH  [SFE_LOGO_FLAME_.1]  73.28,37.85 90 top
LOGO8  SFE_LOGO_FLAME.1_INCH  [SFE_LOGO_FLAME_.1]  66.04,32.89 0 bottom
LOGO9  SFE_LOGO_FLAME.1_INCH  [SFE_LOGO_FLAME_.1]  25.02,58.67 90 top
LOGO10  SFE_LOGO_FLAME.1_INCH  [SFE_LOGO_FLAME_.1]  17.78,53.72 0 bottom
LOGO11  SFE_LOGO_FLAME.1_INCH  [SFE_LOGO_FLAME_.1]  73.28,58.67 90 top
LOGO12  SFE_LOGO_FLAME.1_INCH  [SFE_LOGO_FLAME_.1]  66.04,53.72 0 bottom
LOGO13  SFE_LOGO_FLAME.1_INCH  [SFE_LOGO_FLAME_.1]  25.02,79.5 90 top
LOGO14  SFE_LOGO_FLAME.1_INCH  [SFE_LOGO_FLAME_.1]  17.78,74.55 0 bottom
LOGO15  SFE_LOGO_FLAME.1_INCH  [SFE_LOGO_FLAME_.1]  73.28,79.5 90 top
LOGO16  SFE_LOGO_FLAME.1_INCH  [SFE_LOGO_FLAME_.1]  66.04,74.55 0 bottom
R1  10k  [0603]  20.32,15.75 0 bottom
R2  1k  [0603]  76.2,20.95 180 bottom
R3  1k  [0603]  33.91,12.95 180 bottom
R4  1k  [0603]  82.17,12.95 180 bottom
R5  2.0k  [0603]  27.94,19.68 180 bottom
R6  1k  [0603]  31.75,19.68 0 bottom
R7  2.0k  [0603]  76.2,19.68 180 bottom
R8  1k  [0603]  80.01,19.68 0 bottom
R9  4.7k  [0603]  82.17,14.35 180 bottom
R10  1k  [0603]  27.94,20.95 180 bottom
R11  5.1k  [0603]  14.73,15.24 180 bottom
R12  4.7k  [0603]  33.91,14.35 180 bottom
R13  5.1k  [0603]  14.73,26.42 180 bottom
R14  100k  [0603]  20.32,22.1 0 bottom
R15  10k  [0603]  20.32,18.29 180 bottom
R16  4.7k  [0603]  31.75,20.95 0 bottom
R17  100k  [0603]  20.32,17.02 180 bottom
R18  4.7k  [0603]  80.01,20.95 0 bottom
R19  5.1k  [0603]  62.99,15.24 180 bottom
R20  5.1k  [0603]  62.99,26.42 180 bottom
R21  100k  [0603]  68.58,22.1 0 bottom
R22  10k  [0603]  68.58,18.29 180 bottom
R23  100k  [0603]  68.58,17.02 180 bottom
R24  10k  [0603]  68.58,15.75 0 bottom
R25  1k  [0603]  27.94,41.78 180 bottom
R26  1k  [0603]  33.91,33.78 180 bottom
R27  2.0k  [0603]  27.94,40.51 180 bottom
R28  1k  [0603]  31.75,40.51 0 bottom
R29  4.7k  [0603]  33.91,35.18 180 bottom
R30  4.7k  [0603]  31.75,41.78 0 bottom
R31  5.1k  [0603]  14.73,36.07 180 bottom
R32  5.1k  [0603]  14.73,47.24 180 bottom
R33  100k  [0603]  20.32,42.93 0 bottom
R34  10k  [0603]  20.32,39.12 180 bottom
R35  100k  [0603]  20.32,37.85 180 bottom
R36  10k  [0603]  20.32,36.58 0 bottom
R37  1k  [0603]  76.2,41.78 180 bottom
R38  1k  [0603]  82.17,33.78 180 bottom
R39  2.0k  [0603]  76.2,40.51 180 bottom
R40  1k  [0603]  80.01,40.51 0 bottom
R41  4.7k  [0603]  82.17,35.18 180 bottom
R42  4.7k  [0603]  80.01,41.78 0 bottom
R43  5.1k  [0603]  62.99,36.07 180 bottom
R44  5.1k  [0603]  62.99,47.24 180 bottom
R45  100k  [0603]  68.58,42.93 0 bottom
R46  10k  [0603]  68.58,39.12 180 bottom
R47  100k  [0603]  68.58,37.85 180 bottom
R48  10k  [0603]  68.58,36.58 0 bottom
R49  1k  [0603]  27.94,62.61 180 bottom
R50  1k  [0603]  33.91,54.61 180 bottom
R51  2.0k  [0603]  27.94,61.34 180 bottom
R52  1k  [0603]  31.75,61.34 0 bottom
R53  4.7k  [0603]  33.91,56.01 180 bottom
R54  4.7k  [0603]  31.75,62.61 0 bottom
R55  5.1k  [0603]  14.73,56.9 180 bottom
R56  5.1k  [0603]  14.73,68.07 180 bottom
R57  100k  [0603]  20.32,63.75 0 bottom
R58  10k  [0603]  20.32,59.94 180 bottom
R59  100k  [0603]  20.32,58.67 180 bottom
R60  10k  [0603]  20.32,57.4 0 bottom
R61  1k  [0603]  76.2,62.61 180 bottom
R62  1k  [0603]  82.17,54.61 180 bottom
R63  2.0k  [0603]  76.2,61.34 180 bottom
R64  1k  [0603]  80.01,61.34 0 bottom
R65  4.7k  [0603]  82.17,56.01 180 bottom
R66  4.7k  [0603]  80.01,62.61 0 bottom
R67  5.1k  [0603]  62.99,56.9 180 bottom
R68  5.1k  [0603]  62.99,68.07 180 bottom
R69  100k  [0603]  68.58,63.75 0 bottom
R70  10k  [0603]  68.58,59.94 180 bottom
R71  100k  [0603]  68.58,58.67 180 bottom
R72  10k  [0603]  68.58,57.4 0 bottom
R73  1k  [0603]  27.94,83.44 180 bottom
R74  1k  [0603]  33.91,75.44 180 bottom
R75  2.0k  [0603]  27.94,82.17 180 bottom
R76  1k  [0603]  31.75,82.17 0 bottom
R77  4.7k  [0603]  33.91,76.84 180 bottom
R78  4.7k  [0603]  31.75,83.44 0 bottom
R79  5.1k  [0603]  14.73,77.72 180 bottom
R80  5.1k  [0603]  14.73,88.9 180 bottom
R81  100k  [0603]  20.32,84.58 0 bottom
R82  10k  [0603]  20.32,80.77 180 bottom
R83  100k  [0603]  20.32,79.5 180 bottom
R84  10k  [0603]  20.32,78.23 0 bottom
R85  1k  [0603]  76.2,83.44 180 bottom
R86  1k  [0603]  82.17,75.44 180 bottom
R87  2.0k  [0603]  76.2,82.17 180 bottom
R88  1k  [0603]  80.01,82.17 0 bottom
R89  4.7k  [0603]  82.17,76.84 180 bottom
R90  4.7k  [0603]  80.01,83.44 0 bottom
R91  5.1k  [0603]  62.99,77.72 180 bottom
R92  5.1k  [0603]  62.99,88.9 180 bottom
R93  100k  [0603]  68.58,84.58 0 bottom
R94  10k  [0603]  68.58,80.77 180 bottom
R95  100k  [0603]  68.58,79.5 180 bottom
R96  10k  [0603]  68.58,78.23 0 bottom
S1  RESET  [TACTILE_SWITCH_SMD_4.6X2.8MM]  21.59,25.65 180 top
S2  RESET  [TACTILE_SWITCH_SMD_4.6X2.8MM]  69.85,25.65 180 top
S3  RESET  [TACTILE_SWITCH_SMD_4.6X2.8MM]  21.59,46.48 180 top
S4  RESET  [TACTILE_SWITCH_SMD_4.6X2.8MM]  69.85,46.48 180 top
S5  RESET  [TACTILE_SWITCH_SMD_4.6X2.8MM]  21.59,67.31 180 top
S6  RESET  [TACTILE_SWITCH_SMD_4.6X2.8MM]  69.85,67.31 180 top
S7  RESET  [TACTILE_SWITCH_SMD_4.6X2.8MM]  21.59,88.14 180 top
S8  RESET  [TACTILE_SWITCH_SMD_4.6X2.8MM]  69.85,88.14 180 top
TP1  [PAD.03X.05]  41.4,16.38 0 bottom
TP2  [PAD.03X.05]  41.4,18.03 0 bottom
TP3  TEST-POINT3X5  [PAD.03X.05]  63.25,16.76 0 bottom
TP4  TEST-POINT3X5  [PAD.03X.05]  60.96,18.16 0 bottom
TP5  TEST-POINT3X5  [PAD.03X.05]  14.99,16.76 0 bottom
TP6  TEST-POINT3X5  [PAD.03X.05]  12.7,18.16 0 bottom
TP7  [PAD.03X.05]  89.66,16.38 0 bottom
TP8  [PAD.03X.05]  89.66,18.03 0 bottom
TP9  TEST-POINT3X5  [PAD.03X.05]  14.99,37.59 0 bottom
TP10  TEST-POINT3X5  [PAD.03X.05]  12.7,38.99 0 bottom
TP11  [PAD.03X.05]  41.4,37.21 0 bottom
TP12  [PAD.03X.05]  41.4,38.86 0 bottom
TP13  TEST-POINT3X5  [PAD.03X.05]  63.25,37.59 0 bottom
TP14  TEST-POINT3X5  [PAD.03X.05]  60.96,38.99 0 bottom
TP15  [PAD.03X.05]  89.66,37.21 0 bottom
TP16  [PAD.03X.05]  89.66,38.86 0 bottom
TP17  TEST-POINT3X5  [PAD.03X.05]  14.99,58.42 0 bottom
TP18  TEST-POINT3X5  [PAD.03X.05]  12.7,59.82 0 bottom
TP19  [PAD.03X.05]  41.4,58.04 0 bottom
TP20  [PAD.03X.05]  41.4,59.69 0 bottom
TP21  TEST-POINT3X5  [PAD.03X.05]  63.25,58.42 0 bottom
TP22  TEST-POINT3X5  [PAD.03X.05]  60.96,59.82 0 bottom
TP23  [PAD.03X.05]  89.66,58.04 0 bottom
TP24  [PAD.03X.05]  89.66,59.69 0 bottom
TP25  TEST-POINT3X5  [PAD.03X.05]  14.99,79.25 0 bottom
TP26  TEST-POINT3X5  [PAD.03X.05]  12.7,80.65 0 bottom
TP27  [PAD.03X.05]  41.4,78.87 0 bottom
TP28  [PAD.03X.05]  41.4,80.52 0 bottom
TP29  TEST-POINT3X5  [PAD.03X.05]  63.25,79.25 0 bottom
TP30  TEST-POINT3X5  [PAD.03X.05]  60.96,80.65 0 bottom
TP31  [PAD.03X.05]  89.66,78.87 0 bottom
TP32  [PAD.03X.05]  89.66,80.52 0 bottom
U1  ARTEMIS_MODULESMD  [ARTEMIS_FP]  49.53,17.02 0 top
U2  MCP73831  [SOT23-5]  27.94,17.02 0 bottom
U3  3.3V  [SOT23-5]  36.83,17.02 180 bottom
U4  MCP73831  [SOT23-5]  76.2,17.02 0 bottom
U5  3.3V  [SOT23-5]  85.09,17.02 180 bottom
U6  CH340E_MSOP10  [MSOP10]  14.73,20.83 270 bottom
U7  ARTEMIS_MODULESMD  [ARTEMIS_FP]  97.79,17.02 0 top
U8  CH340E_MSOP10  [MSOP10]  62.99,20.83 270 bottom
U9  MCP73831  [SOT23-5]  27.94,37.85 0 bottom
U10  3.3V  [SOT23-5]  36.83,37.85 180 bottom
U11  ARTEMIS_MODULESMD  [ARTEMIS_FP]  49.53,37.85 0 top
U12  CH340E_MSOP10  [MSOP10]  14.73,41.66 270 bottom
U13  MCP73831  [SOT23-5]  76.2,37.85 0 bottom
U14  3.3V  [SOT23-5]  85.09,37.85 180 bottom
U15  ARTEMIS_MODULESMD  [ARTEMIS_FP]  97.79,37.85 0 top
U16  CH340E_MSOP10  [MSOP10]  62.99,41.66 270 bottom
U17  MCP73831  [SOT23-5]  27.94,58.67 0 bottom
U18  3.3V  [SOT23-5]  36.83,58.67 180 bottom
U19  ARTEMIS_MODULESMD  [ARTEMIS_FP]  49.53,58.67 0 top
U20  CH340E_MSOP10  [MSOP10]  14.73,62.48 270 bottom
U21  MCP73831  [SOT23-5]  76.2,58.67 0 bottom
U22  3.3V  [SOT23-5]  85.09,58.67 180 bottom
U23  ARTEMIS_MODULESMD  [ARTEMIS_FP]  97.79,58.67 0 top
U24  CH340E_MSOP10  [MSOP10]  62.99,62.48 270 bottom
U25  MCP73831  [SOT23-5]  27.94,79.5 0 bottom
U26  3.3V  [SOT23-5]  36.83,79.5 180 bottom
U27  ARTEMIS_MODULESMD  [ARTEMIS_FP]  49.53,79.5 0 top
U28  CH340E_MSOP10  [MSOP10]  14.73,83.31 270 bottom
U29  MCP73831  [SOT23-5]  76.2,79.5 0 bottom
U30  3.3V  [SOT23-5]  85.09,79.5 180 bottom
U31  ARTEMIS_MODULESMD  [ARTEMIS_FP]  97.79,79.5 0 top
U32  CH340E_MSOP10  [MSOP10]  62.99,83.31 270 bottom
U$1  [3V316]  31.24,21.97 0 top
U$2  [____GND____2]  35.94,8.13 0 bottom
U$3  [RST19]  28.83,21.97 0 top
U$4  [I#O3]  21.08,13.97 90 top
U$5  [CHG26]  29.21,18.16 90 top
U$6  [PWR27]  27.3,18.16 90 top
U$7  [GND17]  26.04,21.97 0 top
U$8  [QWIIC#LOGO#JPG]  33.02,13.36 0 top
U$9  [A00]  23.49,12.45 0 top
U$10  [A57]  47.62,12.45 0 bottom
U$11  [SCL30]  50.8,17.27 270 bottom
U$12  [A145]  43.05,21.59 0 bottom
U$13  [ARTEMIS6]  21.72,9.65 0 bottom
U$14  [MISO5]  43.18,21.34 270 bottom
U$15  [MIC0]  22.86,8.89 90 top
U$16  [MOSI4]  47.5,20.45 0 bottom
U$17  [NANO7]  20.57,8.13 0 bottom
U$18  [SCK3]  49.91,20.45 0 bottom
U$19  [A32]  42.55,12.45 0 bottom
U$20  [A00]  27.3,12.45 0 bottom
U$21  [A21]  40,12.45 0 bottom
U$22  [ARTEMIS6]  36.07,13.46 90 top
U$23  [I#O3]  24.64,14.1 0 bottom
U$24  [NANO7]  37.34,14.22 90 top
U$25  [PRODUCTION_INSTRUCTIONS]  60.96,57.66 0 top
U$26  [191]  34.92,18.29 90 top
U$27  [VIN19]  23.62,21.97 0 top
U$28  [A156]  40.39,21.59 0 bottom
U$29  [GND17]  24.77,19.81 0 bottom
U$30  [GND2]  34.8,8.13 0 bottom
U$31  [SDA31]  48.26,17.27 270 bottom
U$32  [46]  44.58,12.45 0 bottom
U$33  [GND17]  29.84,21.97 0 bottom
U$34  [A10]  29.72,12.45 0 bottom
U$35  [68]  49.53,12.45 0 bottom
U$36  [79]  52.07,12.45 0 bottom
U$37  [810]  54.61,12.45 0 bottom
U$38  [RST19]  32.13,21.97 0 bottom
U$39  [VIN19]  27.05,21.97 0 bottom
U$40  [A10]  26.29,12.45 0 top
U$41  [A21]  36.2,12.45 0 top
U$42  [A32]  38.73,12.45 0 top
U$43  [GND17]  21.08,16.38 90 top
U$44  [CHG26]  77.47,18.16 90 top
U$45  [90]  54.61,21.59 0 bottom
U$46  [101]  52.32,21.59 0 bottom
U$47  [112]  49.78,21.59 0 bottom
U$48  [A167]  37.72,21.59 0 bottom
U$49  [3V316]  34.8,21.97 0 bottom
U$50  [RX10]  50.8,21.72 270 bottom
U$51  [RST1]  19.56,23.24 0 top
U$52  [123]  47.5,21.59 0 bottom
U$53  [134]  44.83,21.59 0 bottom
U$54  [A145]  38.48,21.72 0 top
U$55  [A156]  35.94,21.72 0 top
U$56  [A167]  33.27,21.72 0 top
U$57  [17#SDA21]  36.45,11.3 0 bottom
U$58  [PWR27]  75.56,18.16 90 top
U$59  [TX12]  53.34,21.72 270 bottom
U$60  [18#SCL20]  36.32,9.78 0 bottom
U$61  [QWIIC#LOGO#JPG]  81.28,13.36 0 top
U$62  [GND17]  74.3,21.97 0 top
U$63  [VIN19]  71.88,21.97 0 top
U$64  [RST19]  77.09,21.97 0 top
U$65  [3V316]  79.5,21.97 0 top
U$66  [RST1]  67.82,23.24 0 top
U$67  [RX23]  81.28,18.29 90 top
U$68  [TX22]  79.38,18.29 90 top
U$69  [GND17]  78.1,21.97 0 bottom
U$70  [RST19]  80.39,21.97 0 bottom
U$71  [VIN19]  75.31,21.97 0 bottom
U$72  [3V316]  83.06,21.97 0 bottom
U$73  [ARTEMIS6]  69.98,9.65 0 bottom
U$74  [MIC0]  71.12,8.89 90 top
U$75  [MISO5]  91.44,21.34 270 bottom
U$76  [MOSI4]  95.76,20.45 0 bottom
U$77  [NANO7]  68.83,8.13 0 bottom
U$78  [SCK3]  98.17,20.45 0 bottom
U$79  [ARTEMIS6]  84.33,13.46 90 top
U$80  [NANO7]  85.6,14.22 90 top
U$81  [GND2]  83.06,8.13 0 bottom
U$82  [____GND____2]  84.2,8.13 0 bottom
U$83  [PRODUCTION_INSTRUCTIONS]  109.22,57.66 0 top
U$84  [A00]  71.75,12.45 0 top
U$85  [RX23]  33.02,18.29 90 top
U$86  [TX22]  31.11,18.29 90 top
U$87  [46]  92.84,12.45 0 bottom
U$88  [68]  97.79,12.45 0 bottom
U$89  [79]  100.33,12.45 0 bottom
U$90  [810]  102.87,12.45 0 bottom
U$91  [A10]  74.55,12.45 0 top
U$92  [A21]  84.46,12.45 0 top
U$93  [A32]  87,12.45 0 top
U$94  [90]  102.87,21.59 0 bottom
U$95  [101]  100.58,21.59 0 bottom
U$96  [112]  98.04,21.59 0 bottom
U$97  [123]  95.76,21.59 0 bottom
U$98  [134]  93.09,21.59 0 bottom
U$99  [A145]  86.74,21.72 0 top
U$100  [A156]  84.2,21.72 0 top
U$101  [A167]  81.53,21.72 0 top
U$102  [SCL30]  99.06,17.27 270 bottom
U$103  [SDA31]  96.52,17.27 270 bottom
U$104  [TX12]  101.6,21.72 270 bottom
U$105  [A57]  95.88,12.45 0 bottom
U$106  [A32]  90.81,12.45 0 bottom
U$107  [A21]  88.26,12.45 0 bottom
U$108  [A00]  75.56,12.45 0 bottom
U$109  [A10]  77.98,12.45 0 bottom
U$110  [A145]  91.31,21.59 0 bottom
U$111  [A156]  88.65,21.59 0 bottom
U$112  [A167]  85.98,21.59 0 bottom
U$113  [RX10]  99.06,21.72 270 bottom
U$114  [17#SDA21]  84.71,11.3 0 bottom
U$115  [18#SCL20]  84.58,9.78 0 bottom
U$116  [191]  83.19,18.29 90 top
U$117  [I#O3]  69.34,13.97 90 top
U$118  [GND17]  69.34,16.38 90 top
U$119  [I#O3]  72.9,14.1 0 bottom
U$120  [GND17]  73.03,19.81 0 bottom
U$121  [CHG26]  29.21,38.99 90 top
U$122  [PWR27]  27.3,38.99 90 top
U$123  [QWIIC#LOGO#JPG]  33.02,34.19 0 top
U$124  [GND17]  26.04,42.8 0 top
U$125  [VIN19]  23.62,42.8 0 top
U$126  [RST19]  28.83,42.8 0 top
U$127  [3V316]  31.24,42.8 0 top
U$128  [RST1]  19.56,44.07 0 top
U$129  [RX23]  33.02,39.12 90 top
U$130  [TX22]  31.11,39.12 90 top
U$131  [GND17]  29.84,42.8 0 bottom
U$132  [RST19]  32.13,42.8 0 bottom
U$133  [VIN19]  27.05,42.8 0 bottom
U$134  [3V316]  34.8,42.8 0 bottom
U$135  [ARTEMIS6]  21.72,30.48 0 bottom
U$136  [MIC0]  22.86,29.72 90 top
U$137  [MISO5]  43.18,42.16 270 bottom
U$138  [MOSI4]  47.5,41.27 0 bottom
U$139  [NANO7]  20.57,28.96 0 bottom
U$140  [SCK3]  49.91,41.27 0 bottom
U$141  [ARTEMIS6]  36.07,34.29 90 top
U$142  [NANO7]  37.34,35.05 90 top
U$143  [GND2]  34.8,28.96 0 bottom
U$144  [____GND____2]  35.94,28.96 0 bottom
U$145  [PRODUCTION_INSTRUCTIONS]  60.96,78.49 0 top
U$146  [A00]  23.49,33.27 0 top
U$147  [46]  44.58,33.27 0 bottom
U$148  [68]  49.53,33.27 0 bottom
U$149  [79]  52.07,33.27 0 bottom
U$150  [810]  54.61,33.27 0 bottom
U$151  [A10]  26.29,33.27 0 top
U$152  [A21]  36.2,33.27 0 top
U$153  [A32]  38.73,33.27 0 top
U$154  [90]  54.61,42.42 0 bottom
U$155  [101]  52.32,42.42 0 bottom
U$156  [112]  49.78,42.42 0 bottom
U$157  [123]  47.5,42.42 0 bottom
U$158  [134]  44.83,42.42 0 bottom
U$159  [A145]  38.48,42.54 0 top
U$160  [A156]  35.94,42.54 0 top
U$161  [A167]  33.27,42.54 0 top
U$162  [SCL30]  50.8,38.1 270 bottom
U$163  [SDA31]  48.26,38.1 270 bottom
U$164  [TX12]  53.34,42.54 270 bottom
U$165  [A57]  47.62,33.27 0 bottom
U$166  [A32]  42.55,33.27 0 bottom
U$167  [A21]  40,33.27 0 bottom
U$168  [A00]  27.3,33.27 0 bottom
U$169  [A10]  29.72,33.27 0 bottom
U$170  [A145]  43.05,42.42 0 bottom
U$171  [A156]  40.39,42.42 0 bottom
U$172  [A167]  37.72,42.42 0 bottom
U$173  [RX10]  50.8,42.54 270 bottom
U$174  [17#SDA21]  36.45,32.13 0 bottom
U$175  [18#SCL20]  36.32,30.61 0 bottom
U$176  [191]  34.92,39.12 90 top
U$177  [I#O3]  21.08,34.8 90 top
U$178  [GND17]  21.08,37.21 90 top
U$179  [I#O3]  24.64,34.92 0 bottom
U$180  [GND17]  24.77,40.64 0 bottom
U$181  [CHG26]  77.47,38.99 90 top
U$182  [PWR27]  75.56,38.99 90 top
U$183  [QWIIC#LOGO#JPG]  81.28,34.19 0 top
U$184  [GND17]  74.3,42.8 0 top
U$185  [VIN19]  71.88,42.8 0 top
U$186  [RST19]  77.09,42.8 0 top
U$187  [3V316]  79.5,42.8 0 top
U$188  [RST1]  67.82,44.07 0 top
U$189  [RX23]  81.28,39.12 90 top
U$190  [TX22]  79.38,39.12 90 top
U$191  [GND17]  78.1,42.8 0 bottom
U$192  [RST19]  80.39,42.8 0 bottom
U$193  [VIN19]  75.31,42.8 0 bottom
U$194  [3V316]  83.06,42.8 0 bottom
U$195  [ARTEMIS6]  69.98,30.48 0 bottom
U$196  [MIC0]  71.12,29.72 90 top
U$197  [MISO5]  91.44,42.16 270 bottom
U$198  [MOSI4]  95.76,41.27 0 bottom
U$199  [NANO7]  68.83,28.96 0 bottom
U$200  [SCK3]  98.17,41.27 0 bottom
U$201  [ARTEMIS6]  84.33,34.29 90 top
U$202  [NANO7]  85.6,35.05 90 top
U$203  [GND2]  83.06,28.96 0 bottom
U$204  [____GND____2]  84.2,28.96 0 bottom
U$205  [PRODUCTION_INSTRUCTIONS]  109.22,78.49 0 top
U$206  [A00]  71.75,33.27 0 top
U$207  [46]  92.84,33.27 0 bottom
U$208  [68]  97.79,33.27 0 bottom
U$209  [79]  100.33,33.27 0 bottom
U$210  [810]  102.87,33.27 0 bottom
U$211  [A10]  74.55,33.27 0 top
U$212  [A21]  84.46,33.27 0 top
U$213  [A32]  87,33.27 0 top
U$214  [90]  102.87,42.42 0 bottom
U$215  [101]  100.58,42.42 0 bottom
U$216  [112]  98.04,42.42 0 bottom
U$217  [123]  95.76,42.42 0 bottom
U$218  [134]  93.09,42.42 0 bottom
U$219  [A145]  86.74,42.54 0 top
U$220  [A156]  84.2,42.54 0 top
U$221  [A167]  81.53,42.54 0 top
U$222  [SCL30]  99.06,38.1 270 bottom
U$223  [SDA31]  96.52,38.1 270 bottom
U$224  [TX12]  101.6,42.54 270 bottom
U$225  [A57]  95.88,33.27 0 bottom
U$226  [A32]  90.81,33.27 0 bottom
U$227  [A21]  88.26,33.27 0 bottom
U$228  [A00]  75.56,33.27 0 bottom
U$229  [A10]  77.98,33.27 0 bottom
U$230  [A145]  91.31,42.42 0 bottom
U$231  [A156]  88.65,42.42 0 bottom
U$232  [A167]  85.98,42.42 0 bottom
U$233  [RX10]  99.06,42.54 270 bottom
U$234  [17#SDA21]  84.71,32.13 0 bottom
U$235  [18#SCL20]  84.58,30.61 0 bottom
U$236  [191]  83.19,39.12 90 top
U$237  [I#O3]  69.34,34.8 90 top
U$238  [GND17]  69.34,37.21 90 top
U$239  [I#O3]  72.9,34.92 0 bottom
U$240  [GND17]  73.03,40.64 0 bottom
U$241  [CHG26]  29.21,59.82 90 top
U$242  [PWR27]  27.3,59.82 90 top
U$243  [QWIIC#LOGO#JPG]  33.02,55.01 0 top
U$244  [GND17]  26.04,63.63 0 top
U$245  [VIN19]  23.62,63.63 0 top
U$246  [RST19]  28.83,63.63 0 top
U$247  [3V316]  31.24,63.63 0 top
U$248  [RST1]  19.56,64.9 0 top
U$249  [RX23]  33.02,59.94 90 top
U$250  [TX22]  31.11,59.94 90 top
U$251  [GND17]  29.84,63.63 0 bottom
U$252  [RST19]  32.13,63.63 0 bottom
U$253  [VIN19]  27.05,63.63 0 bottom
U$254  [3V316]  34.8,63.63 0 bottom
U$255  [ARTEMIS6]  21.72,51.31 0 bottom
U$256  [MIC0]  22.86,50.55 90 top
U$257  [MISO5]  43.18,62.99 270 bottom
U$258  [MOSI4]  47.5,62.1 0 bottom
U$259  [NANO7]  20.57,49.78 0 bottom
U$260  [SCK3]  49.91,62.1 0 bottom
U$261  [ARTEMIS6]  36.07,55.12 90 top
U$262  [NANO7]  37.34,55.88 90 top
U$263  [GND2]  34.8,49.78 0 bottom
U$264  [____GND____2]  35.94,49.78 0 bottom
U$265  [PRODUCTION_INSTRUCTIONS]  60.96,99.31 0 top
U$266  [A00]  23.49,54.1 0 top
U$267  [46]  44.58,54.1 0 bottom
U$268  [68]  49.53,54.1 0 bottom
U$269  [79]  52.07,54.1 0 bottom
U$270  [810]  54.61,54.1 0 bottom
U$271  [A10]  26.29,54.1 0 top
U$272  [A21]  36.2,54.1 0 top
U$273  [A32]  38.73,54.1 0 top
U$274  [90]  54.61,63.25 0 bottom
U$275  [101]  52.32,63.25 0 bottom
U$276  [112]  49.78,63.25 0 bottom
U$277  [123]  47.5,63.25 0 bottom
U$278  [134]  44.83,63.25 0 bottom
U$279  [A145]  38.48,63.37 0 top
U$280  [A156]  35.94,63.37 0 top
U$281  [A167]  33.27,63.37 0 top
U$282  [SCL30]  50.8,58.93 270 bottom
U$283  [SDA31]  48.26,58.93 270 bottom
U$284  [TX12]  53.34,63.37 270 bottom
U$285  [A57]  47.62,54.1 0 bottom
U$286  [A32]  42.55,54.1 0 bottom
U$287  [A21]  40,54.1 0 bottom
U$288  [A00]  27.3,54.1 0 bottom
U$289  [A10]  29.72,54.1 0 bottom
U$290  [A145]  43.05,63.25 0 bottom
U$291  [A156]  40.39,63.25 0 bottom
U$292  [A167]  37.72,63.25 0 bottom
U$293  [RX10]  50.8,63.37 270 bottom
U$294  [17#SDA21]  36.45,52.96 0 bottom
U$295  [18#SCL20]  36.32,51.43 0 bottom
U$296  [191]  34.92,59.94 90 top
U$297  [I#O3]  21.08,55.63 90 top
U$298  [GND17]  21.08,58.04 90 top
U$299  [I#O3]  24.64,55.75 0 bottom
U$300  [GND17]  24.77,61.47 0 bottom
U$301  [CHG26]  77.47,59.82 90 top
U$302  [PWR27]  75.56,59.82 90 top
U$303  [QWIIC#LOGO#JPG]  81.28,55.01 0 top
U$304  [GND17]  74.3,63.63 0 top
U$305  [VIN19]  71.88,63.63 0 top
U$306  [RST19]  77.09,63.63 0 top
U$307  [3V316]  79.5,63.63 0 top
U$308  [RST1]  67.82,64.9 0 top
U$309  [RX23]  81.28,59.94 90 top
U$310  [TX22]  79.38,59.94 90 top
U$311  [GND17]  78.1,63.63 0 bottom
U$312  [RST19]  80.39,63.63 0 bottom
U$313  [VIN19]  75.31,63.63 0 bottom
U$314  [3V316]  83.06,63.63 0 bottom
U$315  [ARTEMIS6]  69.98,51.31 0 bottom
U$316  [MIC0]  71.12,50.55 90 top
U$317  [MISO5]  91.44,62.99 270 bottom
U$318  [MOSI4]  95.76,62.1 0 bottom
U$319  [NANO7]  68.83,49.78 0 bottom
U$320  [SCK3]  98.17,62.1 0 bottom
U$321  [ARTEMIS6]  84.33,55.12 90 top
U$322  [NANO7]  85.6,55.88 90 top
U$323  [GND2]  83.06,49.78 0 bottom
U$324  [____GND____2]  84.2,49.78 0 bottom
U$325  [PRODUCTION_INSTRUCTIONS]  109.22,99.31 0 top
U$326  [A00]  71.75,54.1 0 top
U$327  [46]  92.84,54.1 0 bottom
U$328  [68]  97.79,54.1 0 bottom
U$329  [79]  100.33,54.1 0 bottom
U$330  [810]  102.87,54.1 0 bottom
U$331  [A10]  74.55,54.1 0 top
U$332  [A21]  84.46,54.1 0 top
U$333  [A32]  87,54.1 0 top
U$334  [90]  102.87,63.25 0 bottom
U$335  [101]  100.58,63.25 0 bottom
U$336  [112]  98.04,63.25 0 bottom
U$337  [123]  95.76,63.25 0 bottom
U$338  [134]  93.09,63.25 0 bottom
U$339  [A145]  86.74,63.37 0 top
U$340  [A156]  84.2,63.37 0 top
U$341  [A167]  81.53,63.37 0 top
U$342  [SCL30]  99.06,58.93 270 bottom
U$343  [SDA31]  96.52,58.93 270 bottom
U$344  [TX12]  101.6,63.37 270 bottom
U$345  [A57]  95.88,54.1 0 bottom
U$346  [A32]  90.81,54.1 0 bottom
U$347  [A21]  88.26,54.1 0 bottom
U$348  [A00]  75.56,54.1 0 bottom
U$349  [A10]  77.98,54.1 0 bottom
U$350  [A145]  91.31,63.25 0 bottom
U$351  [A156]  88.65,63.25 0 bottom
U$352  [A167]  85.98,63.25 0 bottom
U$353  [RX10]  99.06,63.37 270 bottom
U$354  [17#SDA21]  84.71,52.96 0 bottom
U$355  [18#SCL20]  84.58,51.43 0 bottom
U$356  [191]  83.19,59.94 90 top
U$357  [I#O3]  69.34,55.63 90 top
U$358  [GND17]  69.34,58.04 90 top
U$359  [I#O3]  72.9,55.75 0 bottom
U$360  [GND17]  73.03,61.47 0 bottom
U$361  [CHG26]  29.21,80.65 90 top
U$362  [PWR27]  27.3,80.65 90 top
U$363  [QWIIC#LOGO#JPG]  33.02,75.84 0 top
U$364  [GND17]  26.04,84.45 0 top
U$365  [VIN19]  23.62,84.45 0 top
U$366  [RST19]  28.83,84.45 0 top
U$367  [3V316]  31.24,84.45 0 top
U$368  [RST1]  19.56,85.73 0 top
U$369  [RX23]  33.02,80.77 90 top
U$370  [TX22]  31.11,80.77 90 top
U$371  [GND17]  29.84,84.45 0 bottom
U$372  [RST19]  32.13,84.45 0 bottom
U$373  [VIN19]  27.05,84.45 0 bottom
U$374  [3V316]  34.8,84.45 0 bottom
U$375  [ARTEMIS6]  21.72,72.14 0 bottom
U$376  [MIC0]  22.86,71.37 90 top
U$377  [MISO5]  43.18,83.82 270 bottom
U$378  [MOSI4]  47.5,82.93 0 bottom
U$379  [NANO7]  20.57,70.61 0 bottom
U$380  [SCK3]  49.91,82.93 0 bottom
U$381  [ARTEMIS6]  36.07,75.95 90 top
U$382  [NANO7]  37.34,76.71 90 top
U$383  [GND2]  34.8,70.61 0 bottom
U$384  [____GND____2]  35.94,70.61 0 bottom
U$385  [PRODUCTION_INSTRUCTIONS]  60.96,120.14 0 top  (outside the outline)
U$386  [A00]  23.49,74.93 0 top
U$387  [46]  44.58,74.93 0 bottom
U$388  [68]  49.53,74.93 0 bottom
U$389  [79]  52.07,74.93 0 bottom
U$390  [810]  54.61,74.93 0 bottom
U$391  [A10]  26.29,74.93 0 top
U$392  [A21]  36.2,74.93 0 top
U$393  [A32]  38.73,74.93 0 top
U$394  [90]  54.61,84.07 0 bottom
U$395  [101]  52.32,84.07 0 bottom
U$396  [112]  49.78,84.07 0 bottom
U$397  [123]  47.5,84.07 0 bottom
U$398  [134]  44.83,84.07 0 bottom
U$399  [A145]  38.48,84.2 0 top
U$400  [A156]  35.94,84.2 0 top
U$401  [A167]  33.27,84.2 0 top
U$402  [SCL30]  50.8,79.76 270 bottom
U$403  [SDA31]  48.26,79.76 270 bottom
U$404  [TX12]  53.34,84.2 270 bottom
U$405  [A57]  47.62,74.93 0 bottom
U$406  [A32]  42.55,74.93 0 bottom
U$407  [A21]  40,74.93 0 bottom
U$408  [A00]  27.3,74.93 0 bottom
U$409  [A10]  29.72,74.93 0 bottom
U$410  [A145]  43.05,84.07 0 bottom
U$411  [A156]  40.39,84.07 0 bottom
U$412  [A167]  37.72,84.07 0 bottom
U$413  [RX10]  50.8,84.2 270 bottom
U$414  [17#SDA21]  36.45,73.79 0 bottom
U$415  [18#SCL20]  36.32,72.26 0 bottom
U$416  [191]  34.92,80.77 90 top
U$417  [I#O3]  21.08,76.45 90 top
U$418  [GND17]  21.08,78.87 90 top
U$419  [I#O3]  24.64,76.58 0 bottom
U$420  [GND17]  24.77,82.3 0 bottom
U$421  [CHG26]  77.47,80.65 90 top
U$422  [PWR27]  75.56,80.65 90 top
U$423  [QWIIC#LOGO#JPG]  81.28,75.84 0 top
U$424  [GND17]  74.3,84.45 0 top
U$425  [VIN19]  71.88,84.45 0 top
U$426  [RST19]  77.09,84.45 0 top
U$427  [3V316]  79.5,84.45 0 top
U$428  [RST1]  67.82,85.73 0 top
U$429  [RX23]  81.28,80.77 90 top
U$430  [TX22]  79.38,80.77 90 top
U$431  [GND17]  78.1,84.45 0 bottom
U$432  [RST19]  80.39,84.45 0 bottom
U$433  [VIN19]  75.31,84.45 0 bottom
U$434  [3V316]  83.06,84.45 0 bottom
U$435  [ARTEMIS6]  69.98,72.14 0 bottom
U$436  [MIC0]  71.12,71.37 90 top
U$437  [MISO5]  91.44,83.82 270 bottom
U$438  [MOSI4]  95.76,82.93 0 bottom
U$439  [NANO7]  68.83,70.61 0 bottom
U$440  [SCK3]  98.17,82.93 0 bottom
U$441  [ARTEMIS6]  84.33,75.95 90 top
U$442  [NANO7]  85.6,76.71 90 top
U$443  [GND2]  83.06,70.61 0 bottom
U$444  [____GND____2]  84.2,70.61 0 bottom
U$445  [PRODUCTION_INSTRUCTIONS]  109.22,120.14 0 top  (outside the outline)
U$446  [A00]  71.75,74.93 0 top
U$447  [46]  92.84,74.93 0 bottom
U$448  [68]  97.79,74.93 0 bottom
U$449  [79]  100.33,74.93 0 bottom
U$450  [810]  102.87,74.93 0 bottom
U$451  [A10]  74.55,74.93 0 top
U$452  [A21]  84.46,74.93 0 top
U$453  [A32]  87,74.93 0 top
U$454  [90]  102.87,84.07 0 bottom
U$455  [101]  100.58,84.07 0 bottom
U$456  [112]  98.04,84.07 0 bottom
U$457  [123]  95.76,84.07 0 bottom
U$458  [134]  93.09,84.07 0 bottom
U$459  [A145]  86.74,84.2 0 top
U$460  [A156]  84.2,84.2 0 top
U$461  [A167]  81.53,84.2 0 top
U$462  [SCL30]  99.06,79.76 270 bottom
U$463  [SDA31]  96.52,79.76 270 bottom
U$464  [TX12]  101.6,84.2 270 bottom
U$465  [A57]  95.88,74.93 0 bottom
U$466  [A32]  90.81,74.93 0 bottom
U$467  [A21]  88.26,74.93 0 bottom
U$468  [A00]  75.56,74.93 0 bottom
U$469  [A10]  77.98,74.93 0 bottom
U$470  [A145]  91.31,84.07 0 bottom
U$471  [A156]  88.65,84.07 0 bottom
U$472  [A167]  85.98,84.07 0 bottom
U$473  [RX10]  99.06,84.2 270 bottom
U$474  [17#SDA21]  84.71,73.79 0 bottom
U$475  [18#SCL20]  84.58,72.26 0 bottom
U$476  [191]  83.19,80.77 90 top
U$477  [I#O3]  69.34,76.45 90 top
U$478  [GND17]  69.34,78.87 90 top
U$479  [I#O3]  72.9,76.58 0 bottom
U$480  [GND17]  73.03,82.3 0 bottom
Y1  32.768kHz  [CRYSTAL-SMD-3.2X1.5MM]  95.25,18.29 0 bottom
Y2  32.768kHz  [CRYSTAL-SMD-3.2X1.5MM]  46.99,18.29 0 bottom
Y3  32.768kHz  [CRYSTAL-SMD-3.2X1.5MM]  46.99,39.12 0 bottom
Y4  32.768kHz  [CRYSTAL-SMD-3.2X1.5MM]  95.25,39.12 0 bottom
Y5  32.768kHz  [CRYSTAL-SMD-3.2X1.5MM]  46.99,59.94 0 bottom
Y6  32.768kHz  [CRYSTAL-SMD-3.2X1.5MM]  95.25,59.94 0 bottom
Y7  32.768kHz  [CRYSTAL-SMD-3.2X1.5MM]  46.99,80.77 0 bottom
Y8  32.768kHz  [CRYSTAL-SMD-3.2X1.5MM]  95.25,80.77 0 bottom